# EAGLE board Flight Controller PCB (EAGLE 9.6.2)
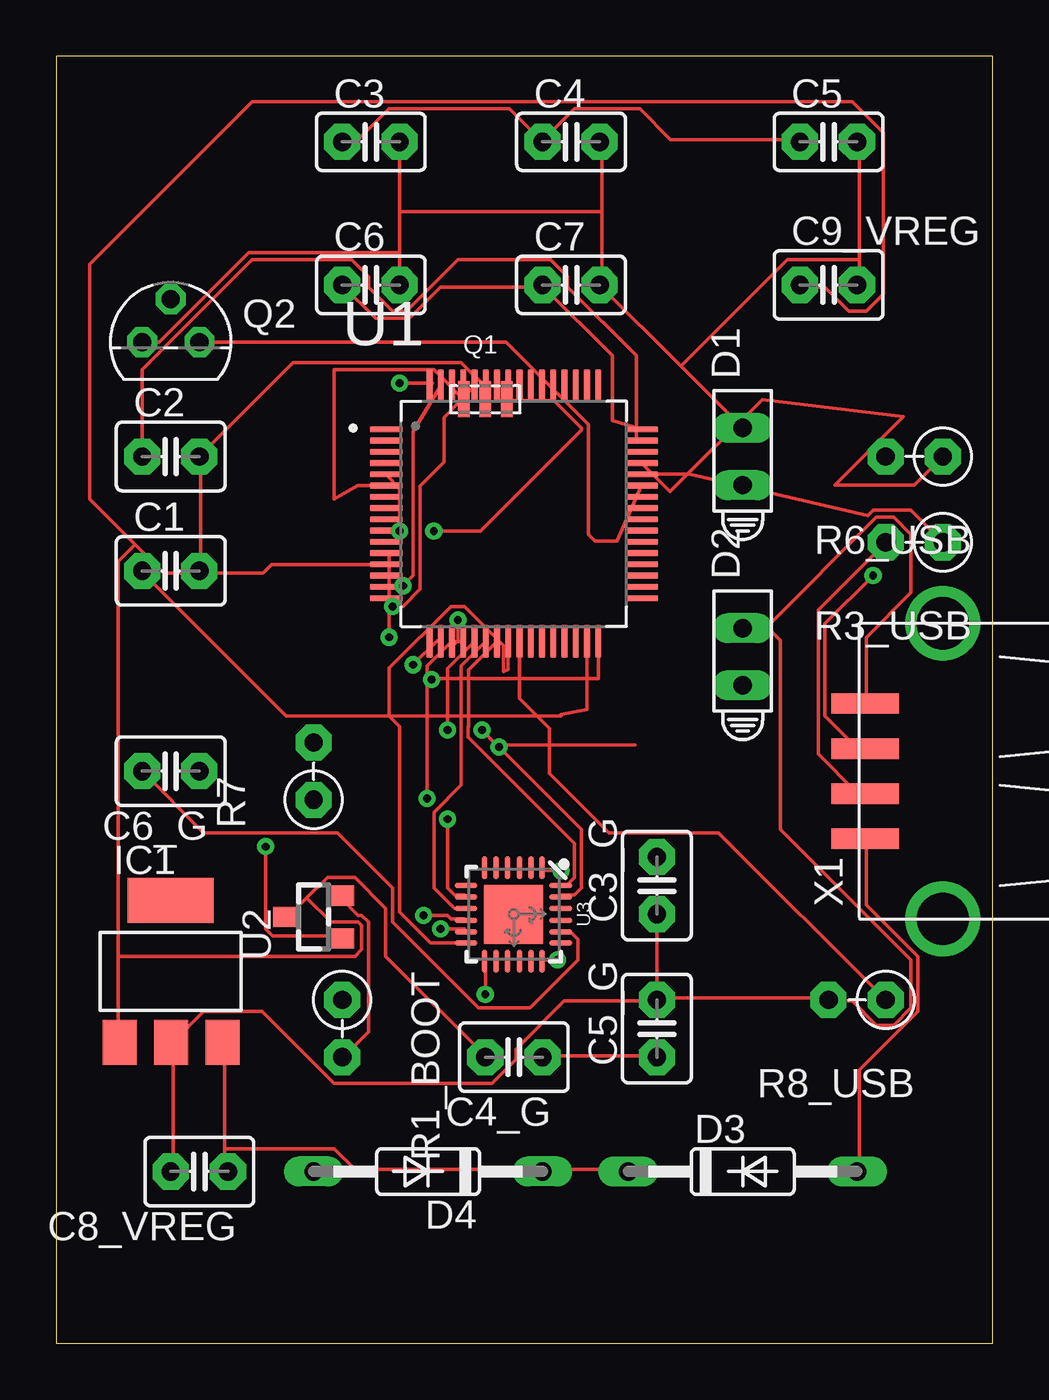
[diagram p0: board, top side]
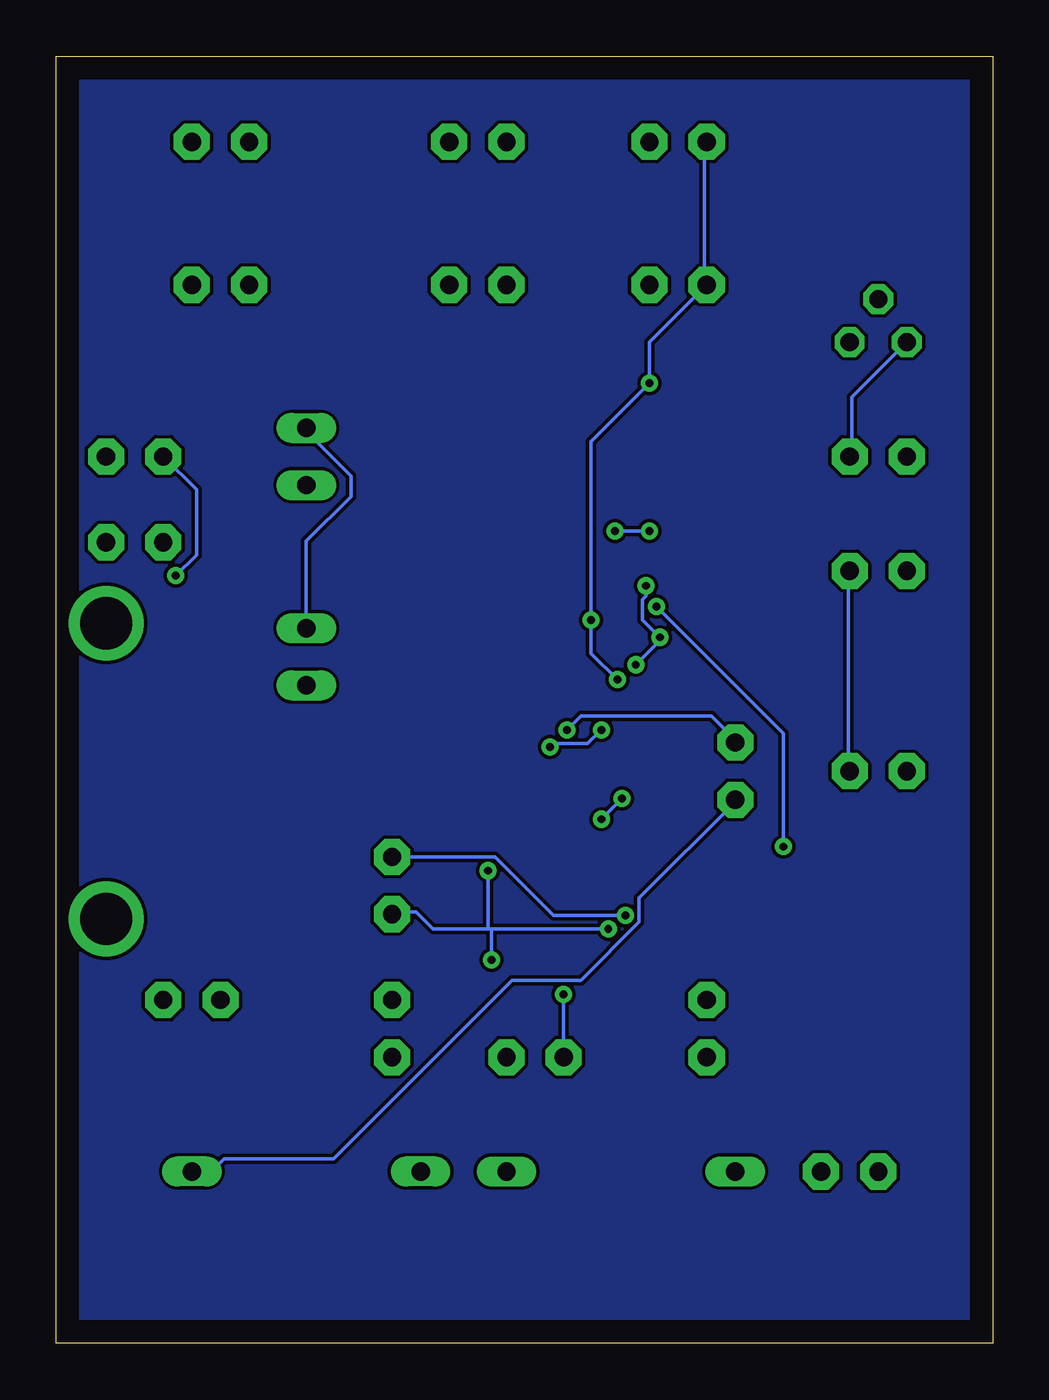
[diagram p1: board, bottom side, seen from below]

Size 41.58 x 57.14 mm. Coordinates in mm from the lower left corner, seen from the top.
Outline: 0,0 41.58,0 41.58,57.14 0,57.14 0,0
Copper layers (1*16): Top 0.035mm / dielectric 1.5mm / Bottom 0.035mm
Design rules "default": minimum track width 6mil, minimum drill 0.35mm, track to track 6mil, track to pad 6mil, pad to pad 6mil, via to via 6mil, smd to smd 6mil, copper to edge 40mil, drill to drill 6mil, minimum pad ring 10mil, minimum via ring 8mil, stop-mask expansion 4mil, vias tented up to drill 0mil, thermal gap 10mil

## Footprints (pad centres in the part's own frame; a part is rotated, then mirrored left to right if it is on the bottom)
C2.5-3 = drill 0.813 pad 1.6 octagon: 1 -1.27,0; 2 1.27,0
C2.5-2 = drill 0.813 pad 1.6 octagon: 1 -1.27,0; 2 1.27,0
HLMP6 = drill 0.813 long: A -1.27,0; K 1.27,0
DO35-10 = drill 0.813 long: A 5.08,0; C -5.08,0
SOT223 = smd 1.499 x 2.007: 1 -2.261,-3.15; 2 0.025,-3.15; 3 2.311,-3.15 | smd 3.81 x 2.007: 4 0,3.15
RESONATOR_MURATA2 = smd 0.5 x 1.6: 1 -0.95,0; 2 0,0; 3 0.95,0
TO92 = drill 0.813 octagon: 1 1.27,0; 2 0,1.905; 3 -1.27,0
RS-2,5 = drill 0.813 pad 1.6 octagon: 1 -1.27,0; 2 1.27,0
QFP50P1200X1200X160-64N = smd 1.47 x 0.28: 1 -5.67,3.75; 2 -5.67,3.25; 3 -5.67,2.75; 4 -5.67,2.25; 5 -5.67,1.75; 6 -5.67,1.25; 7 -5.67,0.75; 8 -5.67,0.25; 9 -5.67,-0.25; 10 -5.67,-0.75; 11 -5.67,-1.25; 12 -5.67,-1.75; 13 -5.67,-2.25; 14 -5.67,-2.75; 15 -5.67,-3.25; 16 -5.67,-3.75; 33 5.67,-3.75; 34 5.67,-3.25; 35 5.67,-2.75; 36 5.67,-2.25; 37 5.67,-1.75; 38 5.67,-1.25; 39 5.67,-0.75; 40 5.67,-0.25; 41 5.67,0.25; 42 5.67,0.75; 43 5.67,1.25; 44 5.67,1.75; 45 5.67,2.25; 46 5.67,2.75; 47 5.67,3.25; 48 5.67,3.75 | smd 0.28 x 1.47: 17 -3.75,-5.67; 18 -3.25,-5.67; 19 -2.75,-5.67; 20 -2.25,-5.67; 21 -1.75,-5.67; 22 -1.25,-5.67; 23 -0.75,-5.67; 24 -0.25,-5.67; 25 0.25,-5.67; 26 0.75,-5.67; 27 1.25,-5.67; 28 1.75,-5.67; 29 2.25,-5.67; 30 2.75,-5.67; 31 3.25,-5.67; 32 3.75,-5.67; 49 3.75,5.67; 50 3.25,5.67; 51 2.75,5.67; 52 2.25,5.67; 53 1.75,5.67; 54 1.25,5.67; 55 0.75,5.67; 56 0.25,5.67; 57 -0.25,5.67; 58 -0.75,5.67; 59 -1.25,5.67; 60 -1.75,5.67; 61 -2.25,5.67; 62 -2.75,5.67; 63 -3.25,5.67; 64 -3.75,5.67
SOT23 = smd 0.9 x 1.2: 1 -0.95,-1.2; 2 0.95,-1.2; 3 0,1.2
QFN-24-EP = smd 1.016 x 0.254: 1 -2.066,1.257; 2 -2.066,0.75; 3 -2.066,0.247; 4 -2.066,-0.287; 5 -2.066,-0.792; 6 -2.066,-1.297; 13 2.086,-1.297; 14 2.086,-0.792; 15 2.086,-0.287; 16 2.086,0.247; 17 2.086,0.75; 18 2.086,1.257 | smd 0.254 x 1.016: 7 -1.267,-2.122; 8 -0.762,-2.122; 9 -0.258,-2.122; 10 0.278,-2.122; 11 0.78,-2.122; 12 1.287,-2.122; 19 1.287,2.082; 20 0.78,2.082; 21 0.278,2.082; 22 -0.258,2.082; 23 -0.762,2.082; 24 -1.267,2.082 | smd 2.616 x 2.616: P$1 0.02,-0.01
USB-A-S = smd 3 x 0.9: D+ 3.45,-1; D- 3.45,1; GND 3.45,-3; VBUS 3.45,3 | drill 2.311: P$5 0,-6.566; P$6 0,6.566

## Placement (x,y rotation side)
C1  100nf  [C2.5-3]  5.08,34.29 0 top
C2  100nf  [C2.5-3]  5.08,39.37 0 top
C3  100nf  [C2.5-2]  13.97,53.34 0 top
C3_G  0.1uf  [C2.5-3]  26.67,20.32 90 top
C4  100nf  [C2.5-2]  22.86,53.34 0 top
C4_G  .1uf  [C2.5-3]  20.32,12.7 180 top
C5  100nf  [C2.5-2]  34.29,53.34 0 top
C5_G  1uf  [C2.5-3]  26.67,13.97 90 top
C6  100nf  [C2.5-2]  13.97,46.99 0 top
C6_G  2.2nf  [C2.5-3]  5.08,25.4 180 top
C7  100nf  [C2.5-2]  22.86,46.99 0 top
C8_VREG  [C2.5-3]  6.35,7.62 180 top
C9_VREG  [C2.5-3]  34.29,46.99 0 top
D1  HLMP6  [HLMP6]  30.48,39.37 90 top
D2  HLMP6  [HLMP6]  30.48,30.48 90 top
D3  1N4446  [DO35-10]  30.48,7.62 0 top
D4  1N4446  [DO35-10]  16.51,7.62 180 top
IC1  REG1118  [SOT223]  5.08,16.51 0 top
Q1  [RESONATOR_MURATA2]  19.05,41.91 180 top
Q2  2N3904-2N  [TO92]  5.08,44.45 0 top
R1_BOOT  10k  [RS-2,5]  12.7,13.97 270 top
R3_USB  22  [RS-2,5]  38.1,35.56 180 top
R6_USB  22  [RS-2,5]  38.1,39.37 180 top
R7  10k  [RS-2,5]  11.43,25.4 90 top
R8_USB  10k  [RS-2,5]  35.56,15.24 180 top
U1  STM32F405RGT6  [QFP50P1200X1200X160-64N]  20.32,36.83 0 top
U2  MAX63XX  [SOT23]  11.43,18.92 90 top
U3  MPU-6000  [QFN-24-EP]  20.32,19.05 270 top
X1  USB-A-S  [USB-A-S]  39.37,25.4 180 top

## Library data of the parts
C1-C3 C3_G C4 C4_G C5 C5_G C6 C6_G C7 C8_VREG C9_VREG = capacitor-wima
D1 D2 = display-hp; MF: AGILENT TECHNOLOGIES; MPN: HLMP-6500; OC_FARNELL: 1652490; OC_NEWARK: 40K0088
D3 D4 = diode
IC1 = burr-brown; MPN: REG1118-2.85/2K5G4; OC_FARNELL: unknown; OC_NEWARK: 14M2185
Q1 Q2 U2 = m-pad-2.1
R1_BOOT R3_USB R6_USB R7 R8_USB = discrete
U1 = STM32F405RGT6; AVAILABILITY: Warning; DESCRIPTION: ARM® Cortex®-M4 STM32F4 Microcontroller IC 32-Bit 168MHz 1MB (1M x 8) FLASH 64-LQFP (10x10); MF: STMicroelectronics; MP: STM32F405RGT6; PACKAGE: LQFP-64 STMicroelectronics; PRICE: None; PURCHASE-URL: https://pricing.snapeda.com/search/part/STM32F405RGT6/?ref=eda
U3 = MPU-6000; AVAILABILITY: Warning; DESCRIPTION: Accelerometer, Gyroscope, 6 Axis Sensor I²C, SPI Output; MF: TDK InvenSense; MP: MPU-6000; PACKAGE: QFN-24 InvenSense; PRICE: None; PURCHASE-URL: https://pricing.snapeda.com/search/part/MPU-6000/?ref=eda
X1 = con-usb

## Nets
5V_USB: D3.A R7.1 X1.VBUS
+5V: D4.A
BUZZER: U1.41
CURRENT_PAD: U1.11
GND: C1.2 C2.2 C3.2 C3_G.1 C4.2 C5.2 C5_G.2 C6.2 C6_G.1 C7.2 C8_VREG.2 C9_VREG.2 D1.K D2.K IC1.2 Q1.2 Q2.3 R8_USB.2 U3.1 U3.11 U3.18 X1.GND
GYRO_CS: U1.20 U3.8
GYRO_INT: U1.24 U3.12
GYRO_SCL: U1.21 U3.23
GYRO_SDA: U1.23 U3.24
GYRO_SDO: U1.22 U3.9
LED: U1.14
LED1: U1.56
LED2: U1.57
N$1: C6_G.2 U3.20
N$2: D1.A
N$3: D2.A
N$4: U1.12 U1.18 U1.63
N$5: C4_G.1 C5_G.1
N$6: C3.1 C4.1 C5.1 C6.1 C7.1 U1.19 U1.32 U1.48 U1.64
N$8: C3_G.2 U3.10
N$9: R3_USB.1 U1.44
N$10: R6_USB.1 U1.45
N$11: Q2.2
N$12: C8_VREG.1 D3.C D4.C IC1.3
N$15: R7.2 R8_USB.1 U1.25
N$19: C1.1 U1.31
N$20: C2.1 U1.47
N$21: U1.58
N$22: U1.59
N$23: U1.60 U2.1
N$24: R1_BOOT.2 U2.2
N$25: R6_USB.2 X1.D+
N$26: R3_USB.2 X1.D-
N$30: Q1.1 U1.5
N$31: Q1.3 U1.6
PPM_IN: U1.40
RSSI_PAD: U1.10
S1: U1.17
S2: U1.26
S3: U1.27
S4: U1.16
UART1_RX: Q2.1 U1.43
UART1_TX: U1.42
UART3_RX: U1.30
UART3_TX: U1.29
UART6_RX: U1.38
UART6_TX: U1.37
VBAT: U1.1
VBAT_PAD: U1.9
VDD: C4_G.2 C9_VREG.1 IC1.1 U1.13 U2.3 U3.13

## Tracks (layer width: path | path; a pad name or v marks a point on that pad's centre or on a via)
5V_USB
  Top 0.152: D3.A 35.66,7.72 35.66,12.14 38.25,14.73 38.25,17.17 35.97,19.46 35.97,22.35 X1.VBUS
  Bottom 0.152: R7.1 11.43,24.03 15.7,19.76 15.7,18.69 18.29,16.1 21.34,16.1 29.26,8.18 34.14,8.18 34.59,7.72 35.51,7.72 D3.A
GND  (via drill 0.35)
  Top 0.152: 5.18,13.36 5.18,7.72 C8_VREG.2 | v17.07,18.39 18.14,18.39 U3.11 | v22.25,17.02 21.64,17.02 U3.18 | v22.4,20.98 21.64,20.98 U3.1 | C3_G.1 26.67,15.34 | 26.67,15.34 34.29,15.34 R8_USB.2 34.29,15.19 35.36,15.19 36.42,14.12 37.19,14.12 37.95,14.88 37.95,17.02 32.16,22.81 32.16,31.19 31.55,31.8 | 26.67,15.34 C5_G.2 26.67,15.19 22.55,15.19 20.42,13.06 20.42,12.6 19.36,11.53 12.34,11.53 9.14,14.73 6.55,14.73 5.18,13.36 | 5.18,13.36 IC1.2 | Q1.2 19.05,42.47 17.98,43.54 10.52,43.54 C2.2 6.4,39.27 6.4,34.39 C1.2 | 31.55,31.8 30.48,31.8 D2.K 31.55,31.8 | 31.55,31.8 36.42,36.68 37.19,36.68 37.95,35.92 37.95,33.33 35.97,31.34 35.97,28.45 X1.GND | 35.66,48.11 35.66,53.29 C5.2 | 35.66,48.11 35.66,47.04 C9_VREG.2 | C3.2 15.24,50.24 | 15.24,50.24 15.24,48.41 | 15.24,48.41 C6.2 | 27.74,43.38 C7.2 24.23,47.04 24.23,50.24 | 27.74,43.38 D1.K | 24.23,50.24 24.23,53.29 C4.2 | 24.23,50.24 15.24,50.24 | 35.66,48.11 32.46,48.11 27.74,43.38 | Q2.3 4.57,44.45 8.53,48.41 15.24,48.41
  Bottom 0.152: 22.4,18.39 24.84,18.39 25.6,19.15 26.67,19.15 C3_G.1 | 22.4,18.39 22.25,18.39 | 22.25,18.39 v17.07,18.39 | 22.25,18.39 v22.25,17.02 | 22.4,18.39 v22.4,20.98 | C6_G.1 6.4,25.4 6.4,34.24 C1.2 | Q2.3 6.25,42.01 6.25,39.42 C2.2 | D2.K 30.48,35.61 28.5,37.59 28.5,38.51 30.48,40.49 D1.K
GYRO_CS  (via drill 0.35)
  Top 0.152: v17.37,23.27 17.37,20.22 17.68,19.91 18.14,19.91 U3.8 | v16.46,24.18 16.46,30.07 17.55,31.16 U1.20
  Bottom 0.152: v16.46,24.18 v17.37,23.27
GYRO_INT
  Top 0.152: U3.12 18.14,17.78 16.61,17.78 15.24,19.15 15.24,27.38 14.78,27.84 14.78,29.97 17.53,32.71 18.14,32.71 19.86,30.99 19.86,29.82 20.07,29.91 U1.24
GYRO_SCL  (via drill 0.35)
  Top 0.152: v19.66,26.47 23.32,22.81 23.32,20.22 23.01,19.91 22.4,19.91 U3.23 | U1.21 17.37,29.96 v17.37,27.23
  Bottom 0.152: v19.66,26.47 19.51,26.62 17.98,26.62 v17.37,27.23
GYRO_SDA
  Top 0.152: U3.24 22.4,20.37 22.71,20.37 23.01,20.68 23.01,22.2 18.29,26.92 18.29,27.35 18.3,27.35 18.3,29.89 U1.23
GYRO_SDO
  Top 0.152: U3.9 18.14,19.3 17.68,19.3 16.76,20.22 16.76,23.57 17.98,24.79 17.98,30.07 U1.22
N$1
  Top 0.152: C6_G.2 6.55,22.66 12.5,22.66 14.94,20.22 14.94,18.69 18.75,14.88 21.03,14.88 23.16,17.02 23.16,17.93 22.86,18.24 22.4,18.24 U3.20
N$4  (via drill 0.35)
  Top 0.152: U1.18 16.93,31.21 v15.85,30.12 | v14.78,31.34 14.78,34.95 U1.12 | v15.39,33.63 15.85,34.09 15.85,40.48 U1.63
  Bottom 0.152: v15.85,30.12 14.78,31.19 v14.78,31.34 15.54,32.11 15.54,33.02 15.39,33.17 v15.39,33.63
N$5
  Top 0.152: C4_G.1 21.64,12.75 26.67,12.75 C5_G.1
N$6  (via drill 0.35)
  Top 0.152: C3.1 12.8,53.44 13.41,53.44 14.78,54.81 20.12,54.81 C4.1 21.64,53.44 23.01,54.81 25.91,54.81 27.28,53.44 32.92,53.44 C5.1 | U1.48 24.69,40.96 24.69,43.84 21.64,46.89 C7.1 21.49,46.89 17.07,46.89 15.7,45.52 14.17,45.52 C6.1 | v15.24,42.62 16.71,42.62 U1.64 | v17.83,32.11 17.83,31.19 17.58,30.94 U1.19 | v16.66,29.46 16.66,29.52 24.07,29.52 U1.32
  Bottom 0.152: v16.66,29.46 17.83,30.63 v17.83,32.11 17.83,40.03 v15.24,42.62 15.24,44.45 C6.1 12.8,47.04 12.8,53.29 C3.1
N$7
  pour Bottom: 0,57.15 41.91,57.15 41.91,0 0,0
N$8  (via drill 0.35)
  Top 0.152: v16.31,19 17.37,19 17.53,18.85 18.14,18.85 U3.10
  Bottom 0.152: v16.31,19 19.51,19 22.1,21.59 C3_G.2
N$9
  Top 0.152: R3_USB.1 37.95,36.98 36.27,36.98 36.04,36.75 28.11,38.58 U1.44
N$10
  Top 0.152: R6_USB.1 38.1,38.1 34.58,38.1 37.61,41.13 31.35,41.9 27.26,37.81 U1.45
N$12
  Top 0.152: D3.C 25.3,7.72 21.64,7.72 D4.C 21.49,7.72 13.26,7.72 12.34,8.64 7.47,8.64 | 7.47,8.64 7.47,7.87 7.62,7.72 C8_VREG.1 | 7.47,8.64 7.47,13.36 IC1.3
N$15  (via drill 0.35)
  Top 0.152: U1.25 20.57,28.62 21.89,27.3 21.89,25.3 24.54,22.66 29.41,22.66 R8_USB.1 | 25.7,26.57 19.56,26.57 v18.9,27.23
  Bottom 0.152: v18.9,27.23 18.29,27.84 12.5,27.84 11.43,26.77 R7.2
N$19
  Top 0.152: U1.31 23.57,28.14 22.4,27.91 22.4,27.84 10.21,27.84 3.81,34.24 C1.1
N$20
  Top 0.152: C2.1 3.81,43.23 8.69,48.11 13.11,48.11 13.87,47.35 13.87,46.89 14.94,45.82 15.54,45.82 17.83,48.11 21.95,48.11 22.71,47.35 22.71,46.89 25.76,43.84 25.76,40.18 U1.47
N$23  (via drill 0.35)
  Top 0.152: v9.3,22.05 9.3,18.39 9.6,18.09 12.5,18.09 U2.1 | v14.94,32.71 15.39,32.71 16.15,33.48 16.15,38.05 17.22,39.12 17.22,41.1 U1.60
  Bottom 0.152: v9.3,22.05 9.3,27.08 v14.94,32.71
N$24
  Top 0.152: U2.2 12.65,19.76 13.41,19 13.56,19 13.87,18.69 13.87,13.82 12.8,12.75 R1_BOOT.2
N$25  (via drill 0.35)
  Top 0.152: v36.27,34.09 34.14,31.95 34.14,27.84 35.51,26.47 35.81,26.47 X1.D+
  Bottom 0.152: v36.27,34.09 35.36,35 35.36,37.9 R6_USB.2
N$26
  Top 0.152: R3_USB.2 33.83,32.56 33.83,26.16 35.51,24.49 35.81,24.49 X1.D-
N$30  (via drill 0.35)
  Top 0.152: v16.76,36.07 18.85,36.07 23.32,40.54 23.32,40.64 22.1,41.86 20.12,41.86 Q1.1 | v15.24,36.07 15.24,37.92 U1.5
  Bottom 0.152: v16.76,36.07 v15.24,36.07
N$31
  Top 0.152: U1.6 13.38,38.08 12.34,37.48 12.34,43.23 16.76,43.23 17.98,42.01 Q1.3
UART1_RX
  Top 0.152: Q2.1 19.96,44.45 23.62,40.79 23.62,35.92 23.93,35.61 24.9,35.61 U1.43
VDD  (via drill 0.35)
  Top 0.152: v19.05,15.49 19.05,16.87 U3.13 | 11.12,19.76 12.04,20.68 13.26,20.68 14.63,19.3 14.63,17.17 19.05,12.75 C4_G.2 | 11.12,19.76 10.36,19 U2.3 | U1.13 9.57,34.58 9.18,34.19 4.78,34.19 3.5,35.46 | 3.5,35.46 2.74,34.7 2.74,17.17 | 2.74,17.17 2.74,13.36 IC1.1 | 3.5,35.46 1.47,37.49 1.47,47.9 8.69,55.12 35.36,55.12 36.73,53.75 36.73,46.58 35.97,45.82 35.2,45.82 34.14,46.89 33.07,46.89 C9_VREG.1 | 11.12,19.76 12.19,18.69 13.41,18.69 13.56,18.54 13.56,17.47 13.26,17.17 2.74,17.17
  Bottom 0.152: C4_G.2 v19.05,15.49